# EAGLE board Front (EAGLE 7.4.0)
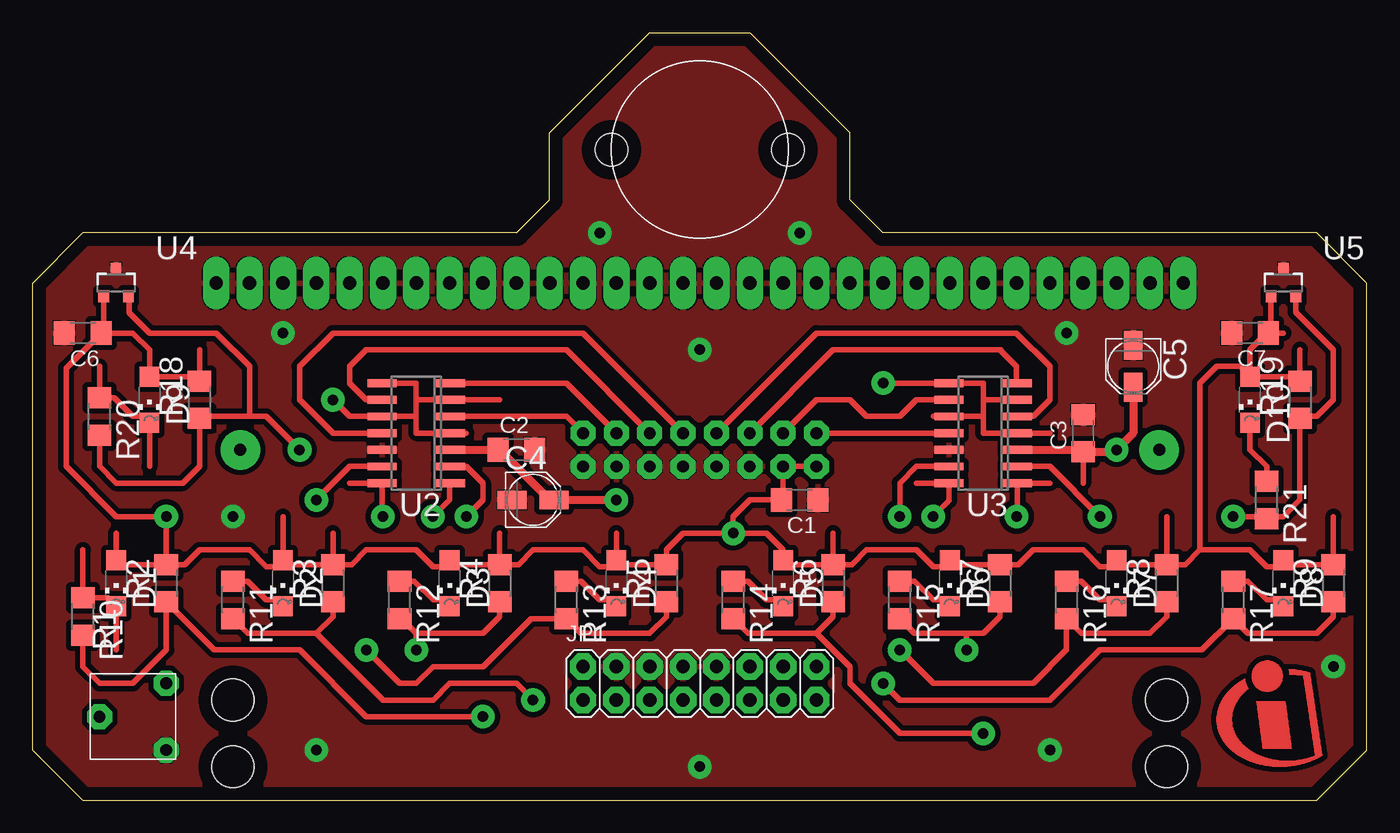
[diagram p0: board, top side]
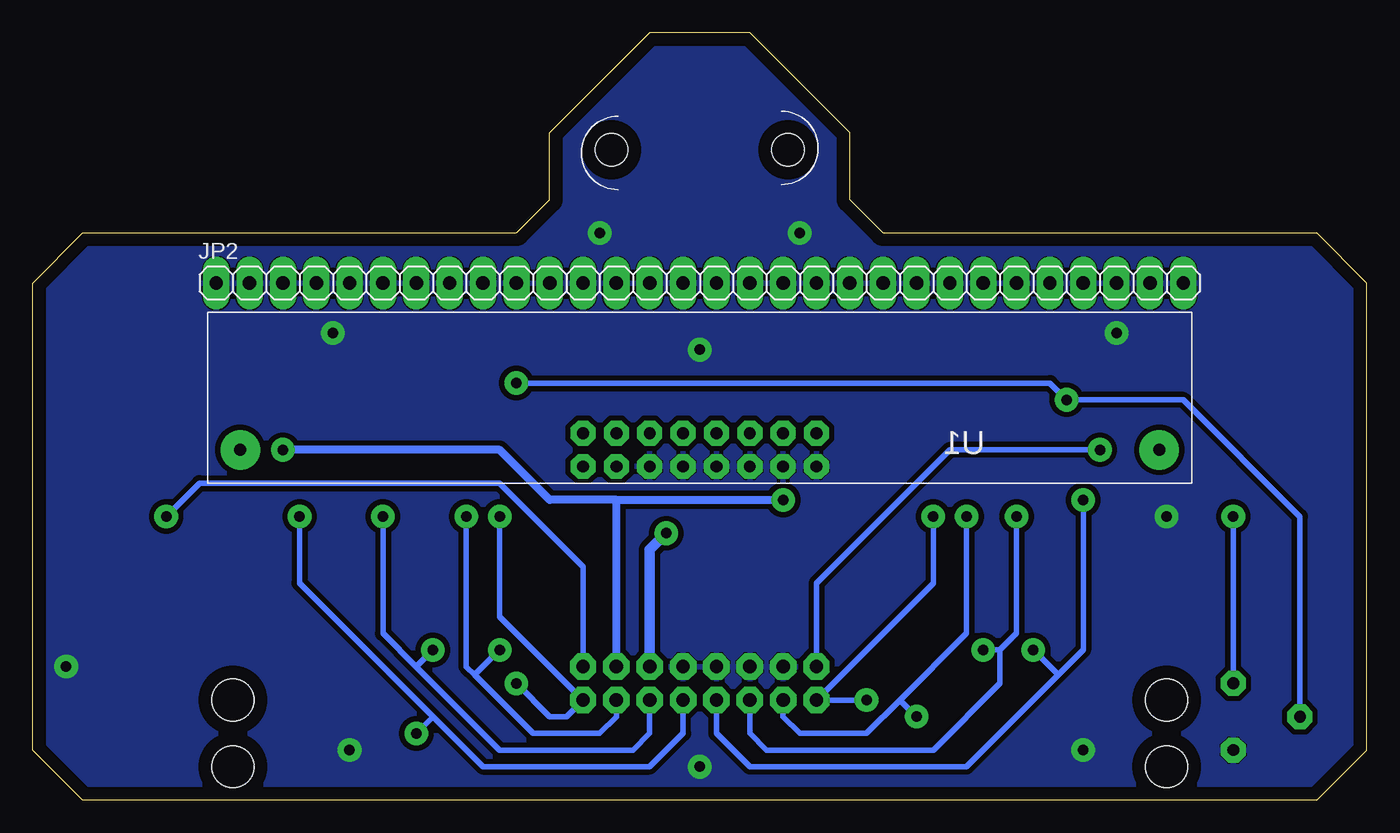
[diagram p1: board, bottom side, seen from below]

Size 101.6 x 58.42 mm. Coordinates in mm from the lower left corner, seen from the top.
Outline: 3.81,0 97.79,0 101.6,3.81 101.6,39.37 97.79,43.18 64.77,43.18 62.23,45.72 62.23,50.8 54.61,58.42 46.99,58.42 39.37,50.8 39.37,45.72 36.83,43.18 3.81,43.18 0,39.37 0,3.81 3.81,0
Copper layers (1*16): Top 0.035mm / dielectric 1.5mm / Bottom 0.035mm
Design rules "Line_Follower_Rules": minimum track width 0.3mm, minimum drill 0.3mm, track to track 0.17mm, track to pad 0.17mm, pad to pad 0.17mm, via to via 0.17mm, smd to smd 0.17mm, copper to edge 1mm, drill to drill 0.5mm, minimum pad ring 0.5mm, minimum via ring 0.5mm, stop-mask expansion 4mil, vias tented up to drill 0mil, thermal gap 0.1mm
Holes 3.2 mm at 15.24,2.54 15.24,7.62 86.36,2.54 86.36,7.62

## Footprints (pad centres in the part's own frame; a part is rotated, then mirrored left to right if it is on the bottom)
BALL = hole 2.5: -6.731,0; 6.731,0
C1206 = smd 1.6 x 1.8: 1 -1.4,0; 2 1.4,0
PANASONIC_B = smd 2.2 x 1.4: + 1.6,0; - -1.6,0
CHIPLED_1206 = smd 1.5 x 1.5: A 0,-1.75; C 0,1.75
2X08 = drill 1.016 octagon: 1 -8.89,-1.27; 2 -8.89,1.27; 3 -6.35,-1.27; 4 -6.35,1.27; 5 -3.81,-1.27; 6 -3.81,1.27; 7 -1.27,-1.27; 8 -1.27,1.27; 9 1.27,-1.27; 10 1.27,1.27; 11 3.81,-1.27; 12 3.81,1.27; 13 6.35,-1.27; 14 6.35,1.27; 15 8.89,-1.27; 16 8.89,1.27
1X30 = drill 1.016 long: 1 -36.83,0; 2 -34.29,0; 3 -31.75,0; 4 -29.21,0; 5 -26.67,0; 6 -24.13,0; 7 -21.59,0; 8 -19.05,0; 9 -16.51,0; 10 -13.97,0; 11 -11.43,0; 12 -8.89,0; 13 -6.35,0; 14 -3.81,0; 15 -1.27,0; 16 1.27,0; 17 3.81,0; 18 6.35,0; 19 8.89,0; 20 11.43,0; 21 13.97,0; 22 16.51,0; 23 19.05,0; 24 21.59,0; 25 24.13,0; 26 26.67,0; 27 29.21,0; 28 31.75,0; 29 34.29,0; 30 36.83,0
TRIMMER = drill 0.9 pad 1.8 octagon: 1 -2.54,-1.27; 2 2.54,-1.27; 3 0,3.81
R1206 = smd 1.6 x 1.803: 1 -1.422,0; 2 1.422,0
QTR-8A = drill 0.9 pad 1.7 octagon: P$1 8.89,1.27; P$2 8.89,-1.27; P$3 6.35,1.27; P$4 6.35,-1.27; P$5 3.81,1.27; P$6 3.81,-1.27; P$7 1.27,1.27; P$8 1.27,-1.27; P$9 -1.27,1.27; P$10 -1.27,-1.27; P$11 -3.81,1.27; P$12 -3.81,-1.27; P$13 -6.35,1.27; P$14 -6.35,-1.27; P$15 -8.89,1.27; P$16 -8.89,-1.27 | drill 0.9 pad 3: P$17 -35,0; P$18 35,0
SO14 = smd 0.6 x 2.2: 1 -3.81,-2.6; 2 -2.54,-2.6; 3 -1.27,-2.6; 4 0,-2.6; 5 1.27,-2.6; 6 2.54,-2.6; 7 3.81,-2.6; 8 3.81,2.6; 9 2.54,2.6; 10 1.27,2.6; 11 0,2.6; 12 -1.27,2.6; 13 -2.54,2.6; 14 -3.81,2.6
SOT23-3 = smd 0.8 x 0.9: 1 -0.95,-1; 2 0.95,-1; 3 0,1.1

## Placement (x,y rotation side)
BALL1  BALL  [BALL]  50.8,49.53 0 top
C1  C_NONPOL100NF  [C1206]  58.42,22.86 180 top
C2  C_NONPOL100NF  [C1206]  36.83,26.67 0 top
C3  C_NONPOL100NF  [C1206]  80.01,27.94 90 top
C4  C-POL10UF  [PANASONIC_B]  38.1,22.86 0 top
C5  C-POL10UF  [PANASONIC_B]  83.82,33.02 270 top
C6  C_NONPOL100NF  [C1206]  3.81,35.56 180 top
C7  C_NONPOL100NF  [C1206]  92.71,35.56 180 top
D1  LED  [CHIPLED_1206]  6.35,16.51 180 top
D2  LED  [CHIPLED_1206]  19.05,16.51 180 top
D3  LED  [CHIPLED_1206]  31.75,16.51 180 top
D4  LED  [CHIPLED_1206]  44.45,16.51 180 top
D5  LED  [CHIPLED_1206]  57.15,16.51 180 top
D6  LED  [CHIPLED_1206]  69.85,16.51 180 top
D7  LED  [CHIPLED_1206]  82.55,16.51 180 top
D8  LED  [CHIPLED_1206]  95.25,16.51 180 top
D9  LED  [CHIPLED_1206]  8.89,30.48 180 top
D10  LED  [CHIPLED_1206]  92.71,30.48 180 top
JP1  [2X08]  50.8,8.89 0 top
JP2  [1X30]  50.8,39.37 0 bottom
R1  R-TRIMMER  [TRIMMER]  8.89,6.35 90 top
R2  12k  [R1206]  10.16,16.51 90 top
R3  12k  [R1206]  22.86,16.51 90 top
R4  12k  [R1206]  35.56,16.51 90 top
R5  12k  [R1206]  48.26,16.51 90 top
R6  12k  [R1206]  60.96,16.51 90 top
R7  12k  [R1206]  73.66,16.51 90 top
R8  12k  [R1206]  86.36,16.51 90 top
R9  12k  [R1206]  99.06,16.51 90 top
R10  470R  [R1206]  3.81,13.97 270 top
R11  470R  [R1206]  15.24,15.24 270 top
R12  470R  [R1206]  27.94,15.24 270 top
R13  470R  [R1206]  40.64,15.24 270 top
R14  470R  [R1206]  53.34,15.24 270 top
R15  470R  [R1206]  66.04,15.24 270 top
R16  470R  [R1206]  78.74,15.24 270 top
R17  470R  [R1206]  91.44,15.24 270 top
R18  12k  [R1206]  12.7,30.48 90 top
R19  12k  [R1206]  96.52,30.48 90 top
R20  470R  [R1206]  5.08,29.21 270 top
R21  470R  [R1206]  93.98,22.86 270 top
U1  SENSOR_BAR_QTR-8ASENSOR_BAR  [QTR-8A]  50.8,26.67 0 top
U2  LM339  [SO14]  29.21,27.94 90 top
U3  LM339  [SO14]  72.39,27.94 90 top
U4  TLE4964-6M  [SOT23-3]  6.35,39.37 0 top
U5  TLE4964-6M  [SOT23-3]  95.25,39.37 0 top
U$1  [INFINEON_LOGO_INFINEON_ICON_8]  90.17,2.54 0 top

## Library data of the parts
BALL1 C2-C5 U$1 = Line_Follower_LIBV3.1
C1 C6 C7 D1-D10 R1-R21 U1-U5 = Line_Follower_LIBV3
JP1 JP2 = pinhead

## Nets
+3V3: C1.2 C6.1 C7.1 D1.A D2.A D3.A D4.A D5.A D6.A D7.A D8.A D9.A D10.A JP1.12 R1.2 R2.2 R3.2 R4.2 R5.2 R6.2 R7.2 R8.2 R9.2 R18.2 R19.2 U1.P$2 U1.P$4 U4.1 U5.1
GND: C1.1 C2.2 C3.2 C4.- C5.- C6.2 C7.2 JP1.4 JP1.6 JP1.8 JP1.10 JP2.1 JP2.2 JP2.3 JP2.4 JP2.5 JP2.6 JP2.7 JP2.8 JP2.9 JP2.10 JP2.11 JP2.12 JP2.13 JP2.14 JP2.15 JP2.16 JP2.17 JP2.18 JP2.19 JP2.20 JP2.21 JP2.22 JP2.23 JP2.24 JP2.25 JP2.26 JP2.27 JP2.28 JP2.29 JP2.30 R1.1 U1.P$6 U1.P$8 U1.P$10 U1.P$12 U1.P$14 U1.P$16 U2.12 U3.12 U4.3 U5.3
LS1_IN: U1.P$15 U2.5
LS1_OUT: JP1.3 R2.1 R10.2 U2.1
LS2_IN: U1.P$13 U2.7
LS2_OUT: JP1.1 R3.1 R11.2 U2.2
LS3_IN: U1.P$11 U2.9
LS3_OUT: JP1.5 R4.1 R12.2 U2.14
LS4_IN: U1.P$9 U2.11
LS4_OUT: JP1.7 R5.1 R13.2 U2.13
LS5_IN: U1.P$7 U3.5
LS5_OUT: JP1.9 R6.1 R14.2 U3.2
LS6_IN: U1.P$5 U3.7
LS6_OUT: JP1.11 R7.1 R15.2 U3.1
LS7_IN: U1.P$3 U3.9
LS7_OUT: JP1.13 R8.1 R16.2 U3.14
LS8_IN: U1.P$1 U3.11
LS8_OUT: JP1.15 R9.1 R17.2 U3.13
MS1: JP1.2 R18.1 R20.2 U4.2
MS2: JP1.16 R19.1 R21.2 U5.2
N$1: D1.C R10.1
N$2: D2.C R11.1
N$3: D3.C R12.1
N$4: D4.C R13.1
N$5: D5.C R14.1
N$6: D6.C R15.1
N$7: D7.C R16.1
N$8: D8.C R17.1
N$9: D10.C R21.1
N$10: D9.C R20.1
REF: R1.3 U2.4 U2.6 U2.8 U2.10 U3.4 U3.6 U3.8 U3.10
V+: C2.1 C3.1 C4.+ C5.+ JP1.14 U2.3 U3.3

## Tracks (layer width: path | path; a pad name or v marks a point on that pad's centre or on a via)
+3V3  (via drill 0.8 pad 1.78)
  Top 0.406: R2.2 6.68,17.93 D1.A | 44.78,17.93 D4.A | R9.2 95.58,17.93 D8.A 94.77,17.78 93.98,17.78 92.71,19.05 88.9,19.05 | v53.34,20.32 49.53,20.32 48.26,19.05 R5.2 44.45,17.93 D4.A | v53.34,20.32 55.88,20.32 57.15,19.05 D5.A 57.15,17.93 R6.2 62.38,17.93 63.5,19.05 67.31,19.05 68.58,17.78 69.37,17.78 D6.A 70.18,17.93 R7.2 75.08,17.93 76.2,19.05 80.01,19.05 81.28,17.78 82.07,17.78 D7.A 82.88,17.93 R8.2 87.78,17.93 88.9,19.05 | R2.2 11.58,17.93 12.7,19.05 16.51,19.05 17.78,17.78 19.05,17.78 D2.A | 18.57,17.78 D2.A | R2.2 v10.16,21.59 6.35,21.59 2.54,25.4 2.54,32.89 C6.1 | v53.34,20.32 53.34,21.59 54.61,22.86 C1.2 | 57.15,22.86 C1.2 | C1.2 57.15,22.99 U1.P$4 U1.P$2 | U4.1 5.4,35.75 C6.1 | R18.2 12.37,32.23 D9.A 8.89,34.29 7.62,35.56 C6.1 | U5.1 94.3,35.75 C7.1 | R19.2 96.19,32.23 D10.A 92.31,32.62 | C7.1 93.98,35.56 | C7.1 93.98,35.43 93.85,35.43 92.71,34.29 92.71,33.02 92.31,32.62 | 92.31,32.62 91.92,33.02 90.17,33.02 88.9,31.75 88.9,19.05 | C7.1 95.25,35.56 | D4.A 44.45,17.78 43.18,17.78 41.91,19.05 38.1,19.05 36.98,17.93 R4.2 32.08,17.93 D3.A 31.27,17.78 30.48,17.78 29.21,19.05 25.4,19.05 24.28,17.93 R3.2 19.05,17.93 D2.A | D4.A 44.45,20.32 | D2.A 19.05,21.59
  Bottom 0.406: R1.2 v10.16,21.59
  Bottom 0.813: JP1.12 54.61,19.05 v53.34,20.32
GND  (via drill 0.8 pad 1.78)
  other vias: 43.18,43.18 58.42,43.18 50.8,34.29 19.05,35.56 78.74,35.56 15.24,21.59 21.59,3.81 50.8,2.54 77.47,3.81 99.06,10.16
  pour Top (isolate 0.406): 36.83,43.18 39.37,45.72 39.37,50.8 46.99,58.42 54.61,58.42 62.23,50.8 62.23,45.72 64.77,43.18 97.79,43.18 101.6,39.37 101.6,3.81 97.79,0 3.81,0 0,3.81 0,39.37 3.81,43.18
  pour Bottom (isolate 0.406): 0,39.37 3.81,43.18 36.83,43.18 39.37,45.72 39.37,50.8 46.99,58.42 54.61,58.42 62.23,50.8 62.23,45.72 64.77,43.18 97.79,43.18 101.6,39.37 101.6,3.81 97.79,0 3.81,0 0,3.81
LS1_IN
  Top 0.406: U1.P$15 40.64,29.21 U2.5
LS1_OUT  (via drill 0.8 pad 1.78)
  Top 0.406: R2.1 10.16,15.24 | R2.1 13.82,11.43 20.32,11.43 25.4,6.35 v34.29,6.35 | U2.1 31.75,24.07 31.75,22.86 v30.48,21.59 | R10.2 3.96,12.7 3.81,12.7 3.81,10.16 5.08,8.89 7.62,8.89 10.16,11.43 R2.1
  Bottom 0.406: v30.48,21.59 30.48,12.7 35.56,7.62 | 35.56,7.62 38.1,5.08 43.18,5.08 44.45,6.35 JP1.3 | v34.29,6.35 35.56,7.62
LS2_IN
  Top 0.406: U1.P$13 40.64,31.75 U2.7
LS2_OUT  (via drill 0.8 pad 1.78)
  Top 0.406: 21.59,12.7 22.86,13.97 R3.1 23.01,15.09 | 21.59,12.7 16.36,12.7 R11.2 15.24,13.97 | v38.1,7.62 36.83,8.89 31.75,8.89 30.48,7.62 26.67,7.62 21.59,12.7 | U2.2 33.02,25.4 34.29,24.13 34.29,22.86 v33.02,21.59
  Bottom 0.406: v33.02,21.59 33.02,16.51 JP1.1 v38.1,7.62
LS3_IN
  Top 0.406: U1.P$11 40.64,34.29 25.4,34.29 24.13,33.02 24.13,31.75 25.4,30.48 U2.9
LS3_OUT  (via drill 0.8 pad 1.78)
  Top 0.406: R4.1 35.56,13.97 34.29,12.7 29.21,12.7 | R12.2 28.09,13.82 29.21,12.7 | 29.21,12.7 v29.21,11.43 | U2.14 26.61,21.65 v26.67,21.59
  Bottom 0.406: 27.94,11.43 27.94,8.89 33.02,3.81 45.72,3.81 46.99,5.08 JP1.5 | v29.21,11.43 27.94,11.43 | v26.67,21.59 26.67,12.7 27.94,11.43
LS4_IN
  Top 0.406: 26.67,27.94 U2.11 22.86,27.94 20.32,30.48 20.32,33.02 22.86,35.56 41.91,35.56 U1.P$9
LS4_OUT  (via drill 0.8 pad 1.78)
  Top 0.406: R5.1 48.26,13.97 46.99,12.7 41.76,12.7 R13.2 37.95,13.82 34.29,10.16 30.48,10.16 29.21,8.89 27.94,8.89 v25.4,11.43 | U2.13 24.13,25.4 v21.59,22.86
  Bottom 0.406: 23.5,9.53 21.59,11.43 v21.59,22.86 | 23.5,9.53 30.48,2.54 46.99,2.54 49.53,5.08 JP1.7 | v25.4,11.43 23.5,9.53
LS5_IN
  Top 0.406: U1.P$7 59.69,35.56 74.93,35.56 77.47,33.02 77.47,30.48 76.2,29.21 U3.5
LS5_OUT  (via drill 0.8 pad 1.78)
  Top 0.406: R6.1 60.96,13.97 59.69,12.7 | 53.34,13.97 R14.2 54.46,12.7 59.69,12.7 | 59.69,12.7 62.23,10.16 62.23,8.89 66.04,5.08 v72.39,5.08 | v81.28,21.59 77.47,25.4 U3.2
  Bottom 0.406: JP1.9 52.07,5.08 54.61,2.54 67.31,2.54 71.12,6.35 | v81.28,21.59 81.28,16.51 71.12,6.35 | 71.12,6.35 v72.39,5.08
LS6_IN
  Top 0.406: U1.P$5 60.96,34.29 73.72,34.29 73.72,34.23 74.93,33.02 74.93,31.81 U3.7
LS6_OUT  (via drill 0.8 pad 1.78)
  Top 0.406: R7.1 73.66,13.97 72.39,12.7 71.12,12.7 | 71.12,12.7 67.16,12.7 R15.2 66.04,13.97 | v71.12,11.43 71.12,12.7 | U3.1 74.99,21.65 v74.93,21.59
  Bottom 0.406: v74.93,21.59 74.93,12.7 72.39,10.16 | 72.39,10.16 66.04,3.81 55.88,3.81 54.61,5.08 JP1.11 | v71.12,11.43 72.39,10.16
LS7_IN
  Top 0.406: U1.P$3 59.69,30.48 62.23,30.48 63.5,29.21 66.04,29.21 67.31,30.48 U3.9
LS7_OUT  (via drill 0.8 pad 1.78)
  Top 0.406: R8.1 86.36,13.97 85.09,12.7 79.86,12.7 R16.2 78.74,11.43 76.2,8.89 68.58,8.89 v66.04,11.43 | U3.14 69.79,22.8 v68.58,21.59
  Bottom 0.406: 67.94,9.53 68.58,10.16 v68.58,21.59 | 67.94,9.53 63.5,5.08 58.42,5.08 57.15,6.35 JP1.13 | v66.04,11.43 67.94,9.53
LS8_IN
  Top 0.406: U1.P$1 U3.11
LS8_OUT  (via drill 0.8 pad 1.78)
  Top 0.406: R9.1 99.06,13.97 97.79,12.7 92.56,12.7 R17.2 89.05,11.43 81.28,11.43 77.47,7.62 66.04,7.62 v64.77,8.89 | U3.13 67.31,25.4 66.04,24.13 v66.04,21.59
  Bottom 0.406: v66.04,21.59 66.04,13.97 JP1.15 60.96,6.35 62.23,6.35 v64.77,8.89
MS1  (via drill 0.8 pad 1.78)
  Top 0.406: 16.51,29.21 12.85,29.21 R18.1 12.7,25.4 11.43,24.13 6.35,24.13 5.08,25.4 R20.2 | 16.51,29.21 17.78,29.21 v20.32,26.67 | U4.2 7.35,38.37 7.35,37.1 8.89,35.56 13.97,35.56 16.51,33.02 16.51,29.21
  Bottom 0.406: v20.32,26.67 31.75,26.67 41.91,16.51 JP1.2
MS2  (via drill 0.8 pad 1.78)
  Top 0.406: v91.44,21.59 93.83,21.59 R21.2 94.13,21.59 95.25,21.59 96.52,22.86 R19.1 96.67,29.21 97.79,29.21 99.06,30.48 99.06,34.29 96.2,37.15 U5.2
  Bottom 0.406: JP1.16 59.69,17.78 66.04,24.13 88.9,24.13 v91.44,21.59
N$1
  Top 0.406: D1.C 6.35,15.24 | R10.1 5.72,15.39 D1.C | D1.C 6.35,11.43
N$2
  Top 0.406: 19.05,15.24 D2.C 18.57,15.24 17.78,15.24 16.36,16.66 R11.1
N$3
  Top 0.406: R12.1 29.06,16.66 30.48,15.24 31.27,15.24 D3.C
N$4
  Top 0.406: R13.1 41.76,16.66 43.18,15.24 43.97,15.24 D4.C
N$5
  Top 0.406: R14.1 54.46,16.66 55.88,15.24 56.67,15.24 D5.C
N$6
  Top 0.406: R15.1 67.16,16.66 68.58,15.24 69.37,15.24 D6.C
N$7
  Top 0.406: R16.1 79.86,16.66 81.28,15.24 82.07,15.24 D7.C
N$8
  Top 0.406: R17.1 92.56,16.66 93.98,15.24 94.77,15.24 D8.C
N$9
  Top 0.406: D10.C 92.71,26.67 93.98,25.4 R21.1
N$10
  Top 0.406: 4.93,30.63 R20.1 6.2,30.63 7.62,29.21 8.89,29.21 D9.C | 8.41,29.21 D9.C | D9.C 8.89,25.4
N$11
  Top 0.406: 5.08,30.48 5.08,33.02
N$13
  Top 0.406: 12.7,31.75 12.7,34.29
N$14
  Top 0.406: 26.67,24.13 24.13,24.13
N$16
  Top 0.406: 69.85,24.13 67.31,24.13
N$17
  Top 0.406: 74.93,24.13 77.47,24.13
N$18
  Top 0.406: 80.01,26.67 80.01,24.13
N$19
  Top 0.406: 96.52,31.75 96.52,34.29
N$21
  Top 0.406: 3.81,15.24 3.81,19.05
N$22
  Top 0.406: 60.96,17.78 60.96,20.32
N$23
  Top 0.406: 6.35,17.78 6.35,20.32
N$26
  Top 0.406: 22.86,17.78 22.86,20.32
N$27
  Top 0.406: 86.36,17.78 86.36,21.59
N$28
  Top 0.406: 35.56,17.78 35.56,20.32
N$30
  Top 0.406: 99.06,17.78 99.06,21.59
REF  (via drill 0.8 pad 1.78)
  Top 0.406: 72.39,29.21 U3.10 68.58,29.21 | 72.39,29.21 72.39,30.48 | 72.39,30.48 72.39,31.75 U3.8 v64.77,31.75 | U3.6 72.39,30.48 | 72.39,29.21 72.39,27.94 U3.4 77.47,27.94 | U2.8 29.21,31.75 29.21,30.48 | 29.21,30.48 29.21,29.21 | 29.21,29.21 29.21,27.94 U2.4 33.02,27.94 | 29.21,29.21 U2.10 24.13,29.21 v22.86,30.48 | 29.21,30.48 U2.6 35.56,30.48
  Bottom 0.406: R1.3 5.08,21.59 13.97,30.48 v22.86,30.48 24.13,31.75 v64.77,31.75
V+  (via drill 0.8 pad 1.78)
  Top 0.61: U2.3 C2.1 35.89,26.67 35.89,26.34 39.37,22.86 C4.+ v44.45,22.86 | U3.3 79.88,26.67 C3.1 82.42,26.54 v82.55,26.67 83.82,27.94 C5.+
  Bottom 0.61: JP1.14 57.15,22.86 | 57.15,22.86 v44.45,22.86 | 57.15,22.86 62.23,22.86 66.04,26.67 v82.55,26.67